# EAGLE board 1-bit register (EAGLE 9.7.0)

Size 201.25 x 81.48 mm. Coordinates in mm from the lower left corner, seen from the top.
Outline: 0,0 201.25,0 201.25,81.48 0,81.48 0,0
Copper layers (1*16): Top 0.035mm / dielectric 1.5mm / Bottom 0.035mm
Design rules "default": minimum track width 6mil, minimum drill 0.35mm, track to track 6mil, track to pad 6mil, pad to pad 6mil, via to via 6mil, smd to smd 6mil, copper to edge 40mil, drill to drill 6mil, minimum pad ring 10mil, minimum via ring 8mil, stop-mask expansion 4mil, vias tented up to drill 0mil, thermal gap 10mil

## Footprints (pad centres in the part's own frame; a part is rotated, then mirrored left to right if it is on the bottom)
BAT_3002 = smd 3.96 x 3.96: N 0,0.65 | smd 5.08 x 5.08: P 12.825,0.65; P1 -12.825,0.65
LEDRD254W60D565H860B = drill 0.981 pad 1.581: 1 -1.27,0; 2 1.27,0
RESAD1016W63L850D250B = drill 0.83 pad 1.43: 1 -5.08,0; 2 5.08,0
DIP762W53P254L1969H508Q14B = drill 0.743 pad 1.343: 1 -3.81,7.62; 2 -3.81,5.08; 3 -3.81,2.54; 4 -3.81,0; 5 -3.81,-2.54; 6 -3.81,-5.08; 7 -3.81,-7.62; 8 3.81,-7.62; 9 3.81,-5.08; 10 3.81,-2.54; 11 3.81,0; 12 3.81,2.54; 13 3.81,5.08; 14 3.81,7.62

## Placement (x,y rotation side)
BAT1  BR2016  [BAT_3002]  185.49,30.81 270 top
BAT2  BR2016  [BAT_3002]  185.49,61.29 270 top
D1  RED  [LEDRD254W60D565H860B]  87.31,7.91 0 top
R1  1k  [RESAD1016W63L850D250B]  88.58,12.99 90 top
U1  74HC04_PDIP  [DIP762W53P254L1969H508Q14B]  14.93,39.66 90 top
U2  74HC08_PDIP  [DIP762W53P254L1969H508Q14B]  37.78,39.66 90 top
U3  74HC32_PDIP  [DIP762W53P254L1969H508Q14B]  58.1,39.66 90 top
U4  74HC74_PDIP  [DIP762W53P254L1969H508Q14B]  83.5,39.66 90 top

## Library data of the parts
BAT1 BAT2 = Tinkercad; CATEGORY: Battery-Holder; CELL_DIAMETER: 20mm; DESCRIPTION: Battery Retainer Coin, 20.0mm 1 Cell SMD (SMT) Tab; MANUFACTURER: Keystone Electronics; MPN: 3002; PART_STATUS: ACTIVE; ROHS_COMPLIANT: COMPLIANT; SERIES: -; SUB_CATEGORY: Holder; TYPE: Coin Cell
D1 = Tinkercad; CATEGORY: Opto-Electronic; SUB-CATEGORY: LED; VALUE: LED_RED
R1 U1-U4 = Tinkercad

## Nets
BAT1+: BAT1.P BAT1.P1 U1.1 U1.14 U2.1 U2.14 U3.14 U4.3 U4.14
BAT2+: BAT1.N BAT2.P BAT2.P1
BAT2-: BAT2.N R1.2 U1.7 U2.2 U2.7 U3.7 U4.7
D1_C: D1.2 R1.1
U1_1Y: U1.2 U2.4
U3_1A: U2.3 U3.1
U3_1B: U2.6 U3.2
U3_1Y: U3.3 U4.2
U4_1Q: D1.1 U2.5 U4.5

## Tracks (layer width: path | path; a pad name or v marks a point on that pad's centre or on a via)
BAT1+  (8 unrouted)
BAT2+  (2 unrouted)
BAT2-  (6 unrouted)
D1_C  (1 unrouted)
U1_1Y  (1 unrouted)
U3_1A  (1 unrouted)
U3_1B  (1 unrouted)
U3_1Y  (1 unrouted)
U4_1Q  (2 unrouted)